# Altium PCB Audio_analyzer.PcbDoc
Units mil, origin at the board's own origin, x right, y up, seen from the top; angles counter-clockwise.
Board outline 2200.66 x 1965.67 mil, 2 copper layers (Top Layer, Bottom Layer); 45 components, 93 nets, 234 pads, 90 vias.
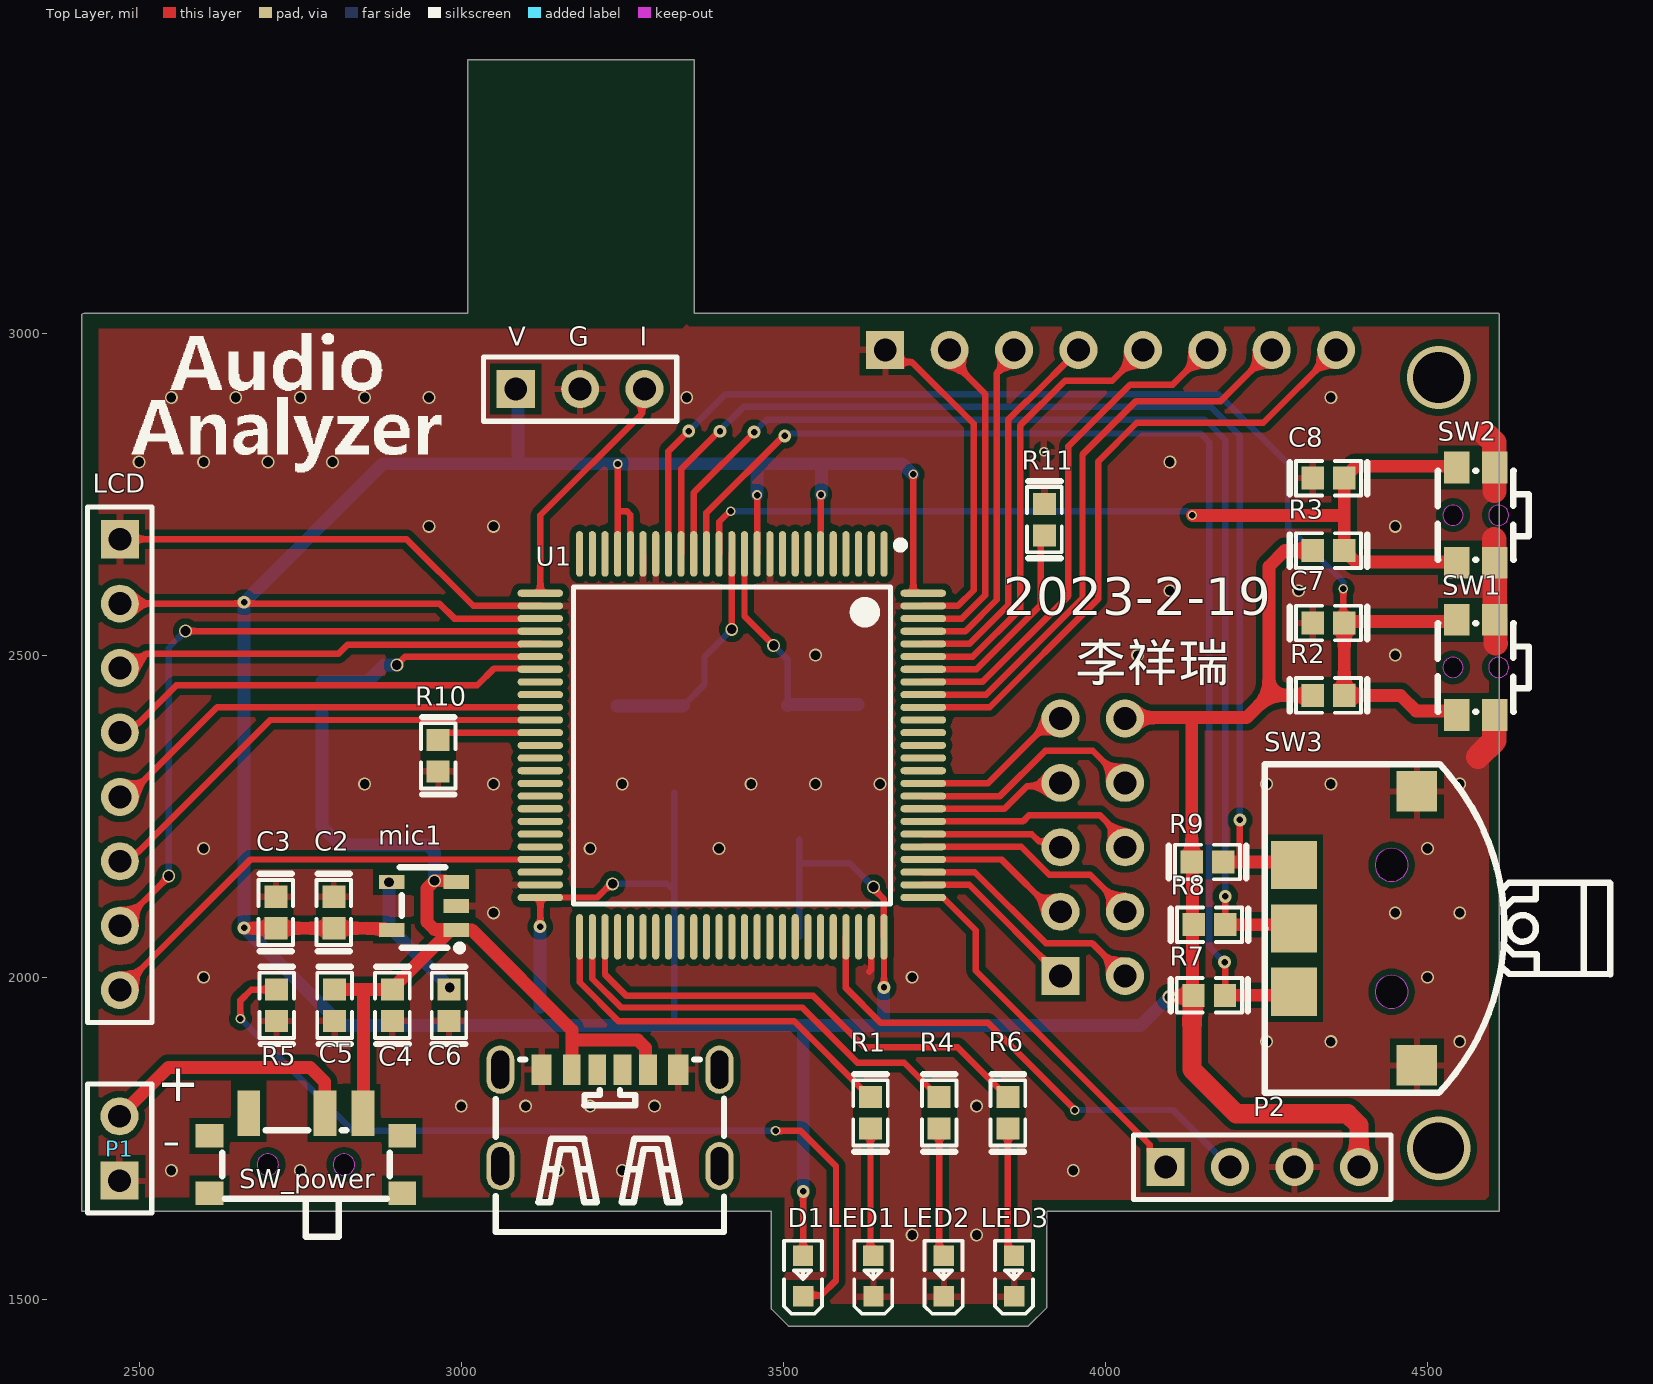
[diagram p0: Top Layer view]
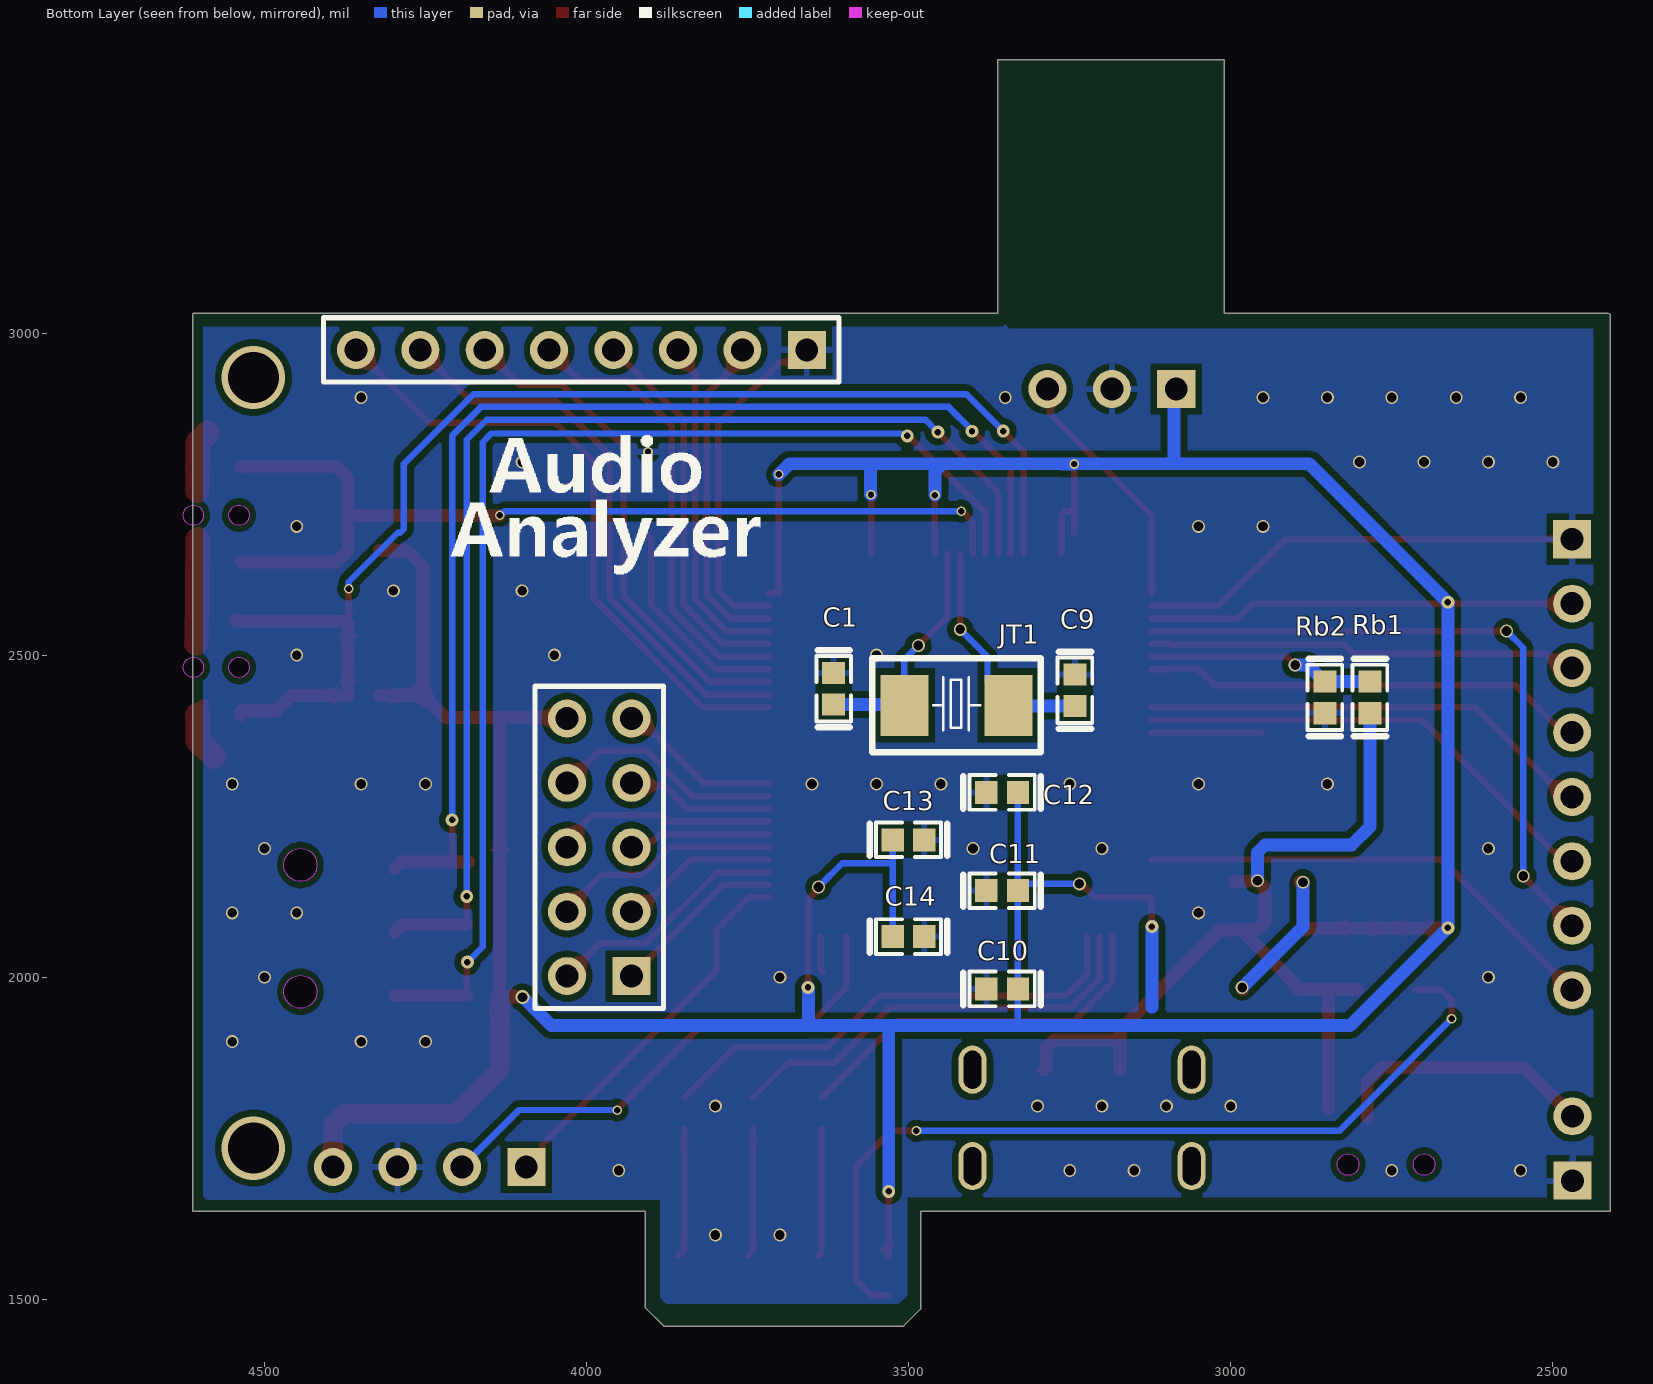
[diagram p1: Bottom Layer view, seen from below]

## Layer stack, top to bottom
Top Solder: solder mask 0.4, Solder Resist, Dk 3.5
Top Layer: signal copper 1.4
Dielectric 1: dielectric 12.6, FR-4, Dk 4.8
Bottom Layer: signal copper 1.4
Bottom Solder: solder mask 0.4, Solder Resist, Dk 3.5

## Board outline
3481.61,1484.95 3481.61,1636.45 2412.31,1636.45 2410.94,1636.4 2410.94,3029.59 2414.27,3030.55 3009.87,3030.55 3009.87,3424.26 3362.01,3424.26 3362.01,3030.55 4610.82,3030.55 4611.61,3029.56 4611.61,1636.38 4608.86,1636.45 3909.22,1636.45 3909.22,1487.55 3880.26,1458.59 3507.97,1458.59

## Design rules (kind name [scope] priority, off if disabled: settings)
Clearance [All] p1: gap=3 ignorepadtopadclearanceinfootprint=FALSE
DiffPairsRouting [All] p1: maxlimit=10 minlimit=0.1 mostfreqgap=10 toplayer_minwidth=0.15 toplayer_maxwidth=15 toplayer_prefwidth=15 bottomlayer_minwidth=0.15 bottomlayer_maxwidth=15 bottomlayer_prefwidth=15 maxuncoupledlength=500
HoleSize [All] p1: absolutevalues=TRUE maxlimit=100 minlimit=0.08 maxpercent=80.000 minpercent=20.000
HoleToHoleClearance [All] p1: gap=0.1 allowstackedmicrovias=TRUE
MinimumSolderMaskSliver [All] p1: minsoldermaskwidth=0.1
PolygonConnect [All] p1: connectstyle=Relief reliefconductorwidth=10 reliefentries=4 polygonreliefangle="90 Angle" airgapwidth=10
RoutingVias [All] p1: holewidth=28 width=50 viastyle="Through Hole" minholewidth=2.8 minwidth=1.06 maxholewidth=28 maxwidth=89.37
SilkToSilkClearance [All] p1: silktosilkclearance=0.1
SilkToSolderMaskClearance [IsPad] p1: minsilkscreentomaskgap=1 clearancetoexposedcopper=TRUE
SolderMaskExpansion [All] p1: expansion=4 istentingtop=FALSE
Width [All] p1: maxlimit=37.56 minlimit=0.21 preferedwidth=10
24 further rules are at their usual default settings.

## Classes and differential pairs
polygon class PolygonClass_1: GND_L02_P000
component class "_Geeky_ Sheet1 copy_2023-02-18": C1 C2 C3 C4 C5 C6 C7 C8 C9 C10 C11 C12 C13 C14 D1 JT1 LED3 mic1 P2 R1 R2 R3 R4 R5 R6 R7 R8 R9 R10 R11 Rb1 Rb2 SW1 SW2 SW3 SW_power U1 "V     G      I"

## Components (designator, comment, footprint, x,y, rotation, side; value= is the part's Value field where it differs from the comment)
1 "接口" typr-c 3241.1,1747.1 r0 top
C1 "22P" 0603 3623.21,2452.97 r270 bottom
C2 "Cap" 0603 2795.22,2105.59 r270 top value=0.1uF
C3 "Cap" 0603 2705.34,2105.59 r270 top value=10uF
C4 "Cap" 0603 2900.08,1951.37 r90 top value=0.1uF
C5 "Cap" 0603 2810.21,1951.37 r90 top value=10uF
C6 "Cap" 0603 2987.81,1951.37 r90 top value=470uF
C7 "100n" 0603 4351.28,2556.82 r180 top
C8 "100n" 0603 4351.28,2781.64 r180 top
C9 "22P" 0603 3248.7,2450.65 r270 bottom
C10 "100n" 0603 3360,1975 r180 bottom
C11 "100n" 0603 3360,2127.5 r180 bottom
C12 "100n" 0603 3360,2280 r180 bottom
C13 "100n" 0603 3495.28,2220.29 r0 bottom
C14 "10u" 0603 3495.28,2070 r0 bottom
D1 "LED0" led_2 3524.98,1537.54 r90 top
JT1 "8MHz" OSC-SMD_L5.0-W3.2 3430,2420 r0 bottom
LCD "Header 8" HDR1X8 2470,2680 r270 top (schematic designator P3)
LED1 "17-21SUYC/TR8" led 3649.19,1532.54 r90 top
LED2 "17-21/BHC-XL2M2TY/3T" led 3758.39,1532.54 r90 top
LED3 "D-W080508W1-KS2" led_2 3852.6,1537.54 r90 top
mic1 "MIC5219" mic5219 2947.4,2110.5 r180 top
P1 "Header 2H" HDR1X2 2469.55,1684.15 r90 top
P2 "Header 4" HDR1X4 4093.53,1705.33 r0 top
R1 "1K" 0603 3628.43,1794.42 r270 top
R2 "10k" 0603 4351.28,2444.4 r180 top
R3 "10k" 0603 4351.28,2669.23 r180 top
R4 "1K" 0603 3735.08,1794.42 r270 top
R5 "Res1" 0603 2720.34,1951.37 r90 top value=1K
R6 "1K" 0603 3841.73,1794.42 r270 top
R7 "10k" 0603 4166.29,1978.87 r180 top
R8 "10k" 0603 4166.56,2088.47 r180 top
R9 "10k" 0603 4163.54,2185.77 r180 top
R10 "1k" 0603 2971.1,2338.7 r90 top
R11 "1k" 0603 3912.18,2705.35 r90 top
Rb1 "Res1" 0603 2790.71,2439.42 r270 bottom value=100K
Rb2 "Res1" 0603 2847,2429.42 r90 bottom value=100K
SW1 "ST-1186BE" SW-SMD_ST-1186BE 4579.98,2455.05 r90 top
SW2 "ST-1186BE" SW-SMD_ST-1186BE 4579.98,2691.48 r90 top
SW3 "TM-2022-3" 旋钮 4559.31,2073.77 r270 top
SW_power "MK-12C02-G025" sw22 2747.5,1756.9 r0 top
U1 "STM32F103VET6" LQFP-100_L14.0-W14.0-P0.50-LS16.0-BL 3420,2360 r180 top
"V     G      I" "HDR-F-2.54_1x3" HDR1X3 3084.57,2913.2 r0 top (schematic designator H1)
? "Comment" HDR1X8 3658.17,2973.86 r0 bottom
? "Comment" HDR2X5 3930.4,2001.77 r90 bottom

## Footprints (in the part's own frame and the unit in brackets; to place one, negate y for a bottom-side part, rotate by r counter-clockwise, add the part's x,y. Pads: shape width x height; smd on the part's side, far side on the other; paste and mask are expansions set on the pad)
0603 [mil]
  rect 34.38x35.72 smd mask+2: 1(-19.47,6.86) 2(29.47,6.86)
  silkscreen extent -55,-20 65,34
HDR1X2 [mm] "Connector; Header; 2 Position"
  rect 1.5x1.5 hole 0.9: 1(0,0)
  round 1.5 hole 0.9: 2(2.54,0)
  silkscreen extent -1.27,-1.27 3.81,1.27
HDR1X3 [mm] "Connector; Header; 3 Position"
  rect 1.5x1.5 hole 0.9: 1(0,0)
  round 1.5 hole 0.9: 2(2.54,0) 3(5.08,0)
  silkscreen extent -1.27,-1.27 6.35,1.27
HDR1X4 [mm] "Connector; Header; 4 Position"
  rect 1.5x1.5 hole 0.9: 1(0,0)
  round 1.5 hole 0.9: 2(2.54,0) 3(5.08,0) 4(7.62,0)
  silkscreen extent -1.27,-1.27 8.89,1.27
HDR1X8 [mm] "Connector; Header; 8 Position"
  rect 1.5x1.5 hole 0.9: 1(0,0)
  round 1.5 hole 0.9: 2(2.54,0) 3(5.08,0) 4(7.62,0) 5(10.16,0) 6(12.7,0) 7(15.24,0) 8(17.78,0)
  silkscreen extent -1.27,-1.27 19.05,1.27
HDR2X5 [mm] "Connector; Header; 5x2 Position"
  rect 1.5x1.5 hole 0.9: 1(0,0)
  round 1.5 hole 0.9: 2(0,2.54) 3(2.54,0) 4(2.54,2.54) 5(5.08,0) 6(5.08,2.54) 7(7.62,0) 8(7.62,2.54) 9(10.16,0) 10(10.16,2.54)
  silkscreen extent -1.27,-1.27 11.43,3.81
led [mm]
  rect 0.8x0.8 smd mask+0.051: 1(-0.707,0.234) 2(0.892,0.241)
  silkscreen extent -1.4,-0.51 1.48,0.99
led_2 [mm]
  rect 0.8x0.8 smd mask+0.051: 1(0.765,-0.14) 2(-0.834,-0.147)
  silkscreen extent -1.52,-0.89 1.36,0.61
LQFP-100_L14.0-W14.0-P0.50-LS16.0-BL [mm]
  oval 0.28x1.8 smd: 1(-6,-7.55) 2(-5.5,-7.55) 3(-5,-7.55) 4(-4.5,-7.55) 5(-4,-7.55) 6(-3.5,-7.55) 7(-3,-7.55) 8(-2.5,-7.55) 9(-2,-7.55) 10(-1.5,-7.55) 11(-1,-7.55) 12(-0.5,-7.55) 13(0,-7.55) 14(0.5,-7.55) 15(1,-7.55) 16(1.5,-7.55) 17(2,-7.55) 18(2.5,-7.55) 19(3,-7.55) 20(3.5,-7.55) 21(4,-7.55) 22(4.5,-7.55) 23(5,-7.55) 24(5.5,-7.55) 25(6,-7.55) 51(6,7.55) 52(5.5,7.55) 53(5,7.55) 54(4.5,7.55) 55(4,7.55) 56(3.5,7.55) 57(3,7.55) 58(2.5,7.55) 59(2,7.55) 60(1.5,7.55) 61(1,7.55) 62(0.5,7.55) 63(0,7.55) 64(-0.5,7.55) 65(-1,7.55) 66(-1.5,7.55) 67(-2,7.55) 68(-2.5,7.55) 69(-3,7.55) 70(-3.5,7.55) 71(-4,7.55) 72(-4.5,7.55) 73(-5,7.55) 74(-5.5,7.55) 75(-6,7.55)
  oval 1.8x0.28 smd: 26(7.55,-6) 27(7.55,-5.5) 28(7.55,-5) 29(7.55,-4.5) 30(7.55,-4) 31(7.55,-3.5) 32(7.55,-3) 33(7.55,-2.5) 34(7.55,-2) 35(7.55,-1.5) 36(7.55,-1) 37(7.55,-0.5) 38(7.55,0) 39(7.55,0.5) 40(7.55,1) 41(7.55,1.5) 42(7.55,2) 43(7.55,2.5) 44(7.55,3) 45(7.55,3.5) 46(7.55,4) 47(7.55,4.5) 48(7.55,5) 49(7.55,5.5) 50(7.55,6) 76(-7.55,6) 77(-7.55,5.5) 78(-7.55,5) 79(-7.55,4.5) 80(-7.55,4) 81(-7.55,3.5) 82(-7.55,3) 83(-7.55,2.5) 84(-7.55,2) 85(-7.55,1.5) 86(-7.55,1) 87(-7.55,0.5) 88(-7.55,0) 89(-7.55,-0.5) 90(-7.55,-1) 91(-7.55,-1.5) 92(-7.55,-2) 93(-7.55,-2.5) 94(-7.55,-3) 95(-7.55,-3.5) 96(-7.55,-4) 97(-7.55,-4.5) 98(-7.55,-5) 99(-7.55,-5.5) 100(-7.55,-6)
  silkscreen extent -6.8,-8.05 6.25,6.25
mic5219 [mm]
  rect 1x0.55 smd mask+0.051: 1(-1.144,0.948) 2(-1.144,-0.002) 3(-1.144,-0.952) 4(1.399,-0.952) 5(1.399,0.948)
  silkscreen extent -1.4,-1.52 1.1,1.78
OSC-SMD_L5.0-W3.2 [mm]
  rect 1.9x2.4 smd mask+0.051: 1(-2.154,-0.055) 2(1.946,-0.055)
  silkscreen extent -3.43,-1.91 3.22,1.8
sw22 [mm]
  rect 0.9x1.8 smd mask+0.051: 1(-1.964,0.819) 2(1.036,0.819) 3(2.536,0.819)
  rect 1.1x0.93 smd mask+0.051: 4(4.086,-0.077) 5(4.086,-2.347) 6(-3.514,-2.347) 7(-3.514,-0.077)
  Keep-Out Layer board cut-out: 2.211,-1.212 2.169,-1.028 2.051,-0.88 1.881,-0.798 1.691,-0.798 1.521,-0.88 1.403,-1.028 1.361,-1.212 1.361,-1.212 1.403,-1.397 1.521,-1.545 1.691,-1.627 1.881,-1.627 2.051,-1.545 2.169,-1.397 2.211,-1.212
  Keep-Out Layer board cut-out: -0.789,-1.212 -0.831,-1.028 -0.949,-0.88 -1.119,-0.798 -1.309,-0.798 -1.479,-0.88 -1.597,-1.028 -1.639,-1.212 -1.639,-1.212 -1.597,-1.397 -1.479,-1.545 -1.309,-1.627 -1.119,-1.627 -0.949,-1.545 -0.831,-1.397 -0.789,-1.212
  silkscreen extent -3.01,-4.06 3.59,0.14
SW-SMD_ST-1186BE [mm]
  rect 1.25x1 smd mask+0.051: 1(-1.217,0.877) 2(2.533,0.877) 3(-1.217,-0.623) 4(2.533,-0.623)
  Keep-Out Layer board cut-out: 1.058,1.027 1.018,1.2 0.907,1.34 0.747,1.417 0.569,1.417 0.409,1.34 0.298,1.2 0.258,1.027 0.258,1.027 0.298,0.853 0.409,0.714 0.569,0.637 0.747,0.637 0.907,0.714 1.018,0.853 1.058,1.027
  Keep-Out Layer board cut-out: 1.058,-0.773 1.018,-0.599 0.907,-0.46 0.747,-0.383 0.569,-0.383 0.409,-0.46 0.298,-0.599 0.258,-0.773 0.258,-0.773 0.298,-0.946 0.409,-1.086 0.569,-1.163 0.747,-1.163 0.907,-1.086 1.018,-0.946 1.058,-0.773
  silkscreen extent -1.09,-1.95 2.41,1.63
typr-c [mil]
  rect 31.5x47.2 smd mask+2: 1(-116.65,109.4) 6(95.95,109.4)
  rect 27.6x47.2 smd mask+2: 2(-69.45,109.4) 3(-30.05,109.4) 4(9.35,109.4) 5(48.75,109.4)
  oval 43.3x74.8 hole 27.6 slot 59.1 at 90 deg mask+2: 7(-180.45,-40.2) 7(-180.45,109.4) 7(159.75,-40.2) 7(159.75,109.4)
  silkscreen extent -188,-143 167,125
旋钮 [mm]
  rect 1.6x1.6 smd mask+0.051: a(-5.454,-1.922) a(5.346,-1.922)
  rect 1.9x1.8 smd mask+0.051: b(2.446,-6.772) c(-0.054,-6.772) d(-2.554,-6.772)
  Keep-Out Layer board cut-out: 3.096,-2.922 3.031,-2.64 2.851,-2.414 2.59,-2.289 2.301,-2.289 2.041,-2.414 1.86,-2.64 1.796,-2.922 1.796,-2.922 1.86,-3.204 2.041,-3.431 2.301,-3.556 2.59,-3.556 2.851,-3.431 3.031,-3.204 3.096,-2.922
  Keep-Out Layer board cut-out: -1.904,-2.922 -1.969,-2.64 -2.149,-2.414 -2.41,-2.289 -2.699,-2.289 -2.959,-2.414 -3.14,-2.64 -3.204,-2.922 -3.204,-2.922 -3.14,-3.204 -2.959,-3.431 -2.699,-3.556 -2.41,-3.556 -2.149,-3.431 -1.969,-3.204 -1.904,-2.922
  silkscreen extent -6.54,-7.92 6.42,5.7

## Part data
1: library part type-c, "TYPE_C"
C1 C9: library part 20P, nameAlias=Value(F), spicePre=C, spiceSymbolName=Cap_0805_US
C2 C3 C4 C5 C6: "Capacitor", LatestRevisionDate=17-Jul-2002, LatestRevisionNote="Re-released for DXP Platform.", PackageDescription="Radial Cap, Thru-Hole; 2 Leads; 0.3 in Pin Spacing", PackageReference=RAD-0.3, Published=8-Jun-2000, Publisher="Altium Limited"
C14: library part 22u, nameAlias=Value(F), spicePre=C, spiceSymbolName=Cap_0805_US
D1: "Typical INFRARED GaAs LED", LatestRevisionDate=08-Jul-2005, LatestRevisionNote="Mech Layer 1 removed.", PackageDescription="LED; 2 Leads", PackageReference=LED-0, Published=8-Jun-2000, Publisher="Altium Limited"
JT1: BOM_Manufacturer="TAITIEN Elec", BOM_Manufacturer Part=XIHCELNANF-48MHZ, BOM_Supplier=LCSC, BOM_Supplier Part=C295085, Contributor=LCSC, nameAlias=Frequency, spicePre=X, spiceSymbolName=XIHCELNANF-48MHZ
LCD: "Header, 8-Pin", LatestRevisionDate=17-Jul-2002, LatestRevisionNote="Re-released for DXP Platform.", Publisher="Altium Limited"
LED1: BOM_LCSC Assembly=Yes, BOM_Manufacturer=KENTO, BOM_Manufacturer Part=17-21SUYC/TR8, BOM_Supplier=LCSC, BOM_Supplier Part=C2296, image=//image.lceda.cn/szlcsc/C2296.jpg, SMT Type=Basic, spicePre=L, spiceSymbolName=17-21SUYC/TR8
LED2: BOM_LCSC Assembly=Yes, BOM_Manufacturer=EVERLIGHT, BOM_Manufacturer Part=17-21/BHC-XL2M2TY/3T, BOM_Supplier=LCSC, BOM_Supplier Part=C72035, image=//image.lceda.cn/szlcsc/C72035.jpg, SMT Type=Extend, spicePre=L, spiceSymbolName=17-21/BHC-XL2M2TY/3T
LED3: BOM_Manufacturer=ARKLED, BOM_Manufacturer Part=D-W080508W1-KS2, BOM_Supplier=LCSC, BOM_Supplier Part=C130115, Contributor=LCSC, spicePre=L, spiceSymbolName=D-W080508W1-KS2
P1: "Header, 2-Pin, Right Angle", LatestRevisionDate=17-Jul-2002, LatestRevisionNote="Re-released for DXP Platform.", Publisher="Altium Limited"
P2: "Header, 4-Pin", LatestRevisionDate=17-Jul-2002, LatestRevisionNote="Re-released for DXP Platform.", Publisher="Altium Limited"
R1 R4 R6: library part 330, nameAlias=Value(Ω), spicePre=R, spiceSymbolName=Res_0805(1/8W)_EU
R5 Rb1 Rb2: "Resistor", LatestRevisionDate=17-Jul-2002, LatestRevisionNote="Re-released for DXP Platform.", PackageDescription="Axial Device, Thru-Hole; 2 Leads; 0.3 in Pin Spacing", PackageReference=AXIAL-0.3, Published=8-Jun-2000, Publisher="Altium Limited"
R10 R11: library part 10k, nameAlias=Value(Ω), spicePre=R, spiceSymbolName=Res_0805(1/8W)_EU
SW1 SW2: Actuator/Cap Color=黑色, Contact Current=50mA, Insulation Resistance=100MΩ, JLCPCB Part Class="Extended Part", LCSC Part Name=轻触开关侧按小龟, Manufacturer=RISHENG(日昇), Operating Force=240gf@±50gf, Operating Temperature=-20℃~+85℃, Voltage Rating (DC)=12V, Actuator Style=矩形按钮, Add into BOM=yes, Circuit=单刀单掷, Convert to PCB=yes, Datasheet=https://atta.szlcsc.com/upload/public/pdf/source/20200922/C589197_4714EBBCA4733C94112B39947E772B4E.pdf, Device=ST-1186BE, Manufacturer Part=ST-1186BE, Mechanical Life=50000, Mounting Style=卧贴, Name=ST-1186BE, Pin Style=SMD接片, Strike Gundam=否, Supplier=LCSC, Supplier Footprint=SMD, Supplier Part=C589197, Switch Height=1.45mm, Switch Length=3.5mm, Switch Width=3mm, Symbol=ST-1186BE
SW3: JLCPCB Part Class="Extended Part", LCSC Part Name="数码相机拨轮开关  3挡拨轮开关", Manufacturer="XKB Connectivity(中国星坤)", Add into BOM=yes, Convert to PCB=yes, Datasheet=https://atta.szlcsc.com/upload/public/pdf/source/20211015/3476D939D9FB2BD124C91E3A6F460D4F.pdf, Device=TM-2022-3, Manufacturer Part=TM-2022-3, Name=TM-2022-3, Supplier=LCSC, Supplier Footprint=SMD, Supplier Part=C318952, Symbol=TM-2022-3
SW_power: Actuator Color=黑色, Current Rating (DC)=1A, JLCPCB Part Class="Extended Part", LCSC Part Name=七脚小拨动开关2.5柄, Manufacturer=G-Switch(品赞), Operating Temperature=-20℃~+70℃, Voltage Rating (DC)=6V, Actuator Style=矩形柱状, Add into BOM=yes, Circuit=单刀双掷, Convert to PCB=yes, Datasheet=https://atta.szlcsc.com/upload/public/pdf/source/20200902/C778186_2AF08473ED98414D93A175E8814EEFA6.pdf, Device=MK-12C02-G025, Manufacturer Part=MK-12C02-G025, Mechanical Life=10000, Mounting Style=卧贴, Name=MK-12C02-G025, Pin Style=SMD接片, Supplier=LCSC, Supplier Footprint=SMD, Supplier Part=C778186, Switch Height=5.2mm, Switch Length=6.6mm, Switch Width=2.7mm, Symbol=MK-12C02-G025
U1: BOM_LCSC Assembly=Yes, BOM_Manufacturer=STMicroelectronics, BOM_Manufacturer Part=STM32F103VET6, BOM_Supplier=LCSC, BOM_Supplier Part=C8308, image=//image.lceda.cn/szlcsc/C8308.jpg, SMT Type=Basic, spicePre=U, spiceSymbolName=STM32F103VET6
C7 C8 C10 C11 C12 C13: nameAlias=Value(F), spicePre=C, spiceSymbolName=Cap_0805_US
R2 R3 R7 R8 R9: nameAlias=Value(Ω), spicePre=R, spiceSymbolName=Res_0805(1/8W)_EU
"V     G      I": BOM_Supplier=LCSC, BOM_Supplier Part=C146690, Contributor=LCEDA_Lib, spicePre=H, spiceSymbolName=HDR-F-2.54_1x3

## Via types
v1: diameter 20, hole 15, Top Layer to Bottom Layer, 64 vias
v2: diameter 20, hole 10, Top Layer to Bottom Layer, 12 vias
v3: diameter 15, hole 10, Top Layer to Bottom Layer, 11 vias
v4: diameter 98.43, hole 78.74, Top Layer to Bottom Layer, 2 vias
v5: diameter 22, hole 15, Top Layer to Bottom Layer, 1 vias

## Nets (pads, with @x,y where several pads share a name; then routed paths per layer and width w, separated by ;. In a path a pad name is that pad's centre, name@x,y a point inside that pad or via, vN(x,y) a via of type N, cw(c..) or ccw(c..) an arc to the next point about the centre after c; other vN are vias at no path point)
+3.3V: "V     G      I.1" ?.10 C2.2 C3.2 C10.2 C11.2 C12.2 C13.2 C14.2 D1.1 LCD.2 mic1.5 P2.4 R2.2 R3.2 R7.2 R8.2 R9.2 U1.6 U1.11 U1.21 U1.22 U1.28 U1.50 U1.75 U1.100 | length 7973
  Top Layer w10: LCD.2 2966.21,2580 2989.36,2556.85 U1.28 ; v2(3122.45,2078.57) 3122.76,2078.87 U1.50 3211.07,2123.78 3232.29,2145 v1(3235,2145) ; U1.22@3242.83,2689.59 3242.83,2723.73 ; v3(3242.83,2796.83) 3242.83,2723.73 ; U1.21 3262.52,2717.87 3256.66,2723.73 3242.83,2723.73 ; v3(3459.19,2748.58) 3459.37,2748.4 U1.11 ; D1.1 D1.1@3539.64,1576.82 ; D1.1@3530.81,1573.97 v2(3530.84,1667.53) ; U1.6 3558,2657.44 3558,2748.62 v3(3558.45,2749.07) ; v1(3640,2140) 3640,2137.29 3656.22,2121.07 U1.75 3656.26,2062.72 3656.26,1984.27 v2(3656.3,1984.23) ; v3(3701.7,2780.64) 3701.7,2596.69 3702.17,2596.22 U1.100
  Top Layer w20: v2(2662.96,2076.64) 2663.48,2076.12 C3.2 C2.2 2880.54,2076.12 2883.48,2073.18 mic1.5 ; ?.10@4026.56,2403.08 4219.3,2403.08 ; v5@4099.65,1968.89 v5(4099.4,1969.14) 4099.78,1969.52 4134.33,1969.52 R7.2 4135.45,1973.39 4135.45,2177.54 R9.2 4134.07,2401.08 ; 4220.71,2404.49 4253.76,2437.54 ; R2.2 4253.76,2437.54 ; R3.2 4278.51,2662.37 4253.76,2637.63 4253.76,2437.54
  Top Layer w30: R7.2@4134.33,1969.52 4134.33,1856.83 4203.25,1787.91 4375.96,1787.91 4393.53,1770.34 P2.4
  Bottom Layer w10: v1(3235,2145) 3319.89,2145 C11.2 ; C12.2 C11.2 ; 3332.1,1924.9 3330.53,1926.47 C10.2 C11.2 ; C14.2 3524.75,2175.47 3526.18,2176.9 ; C13.2 3524.75,2178.33 3526.18,2176.9 ; v1(3640,2140) 3603.1,2176.9 3526.18,2176.9
  Bottom Layer w20: 3088.01,2894.87 3088.01,2797.24 ; 3122.45,1953.48 v2(3122.45,2078.57) ; v3(3459.19,2748.58) 3459.19,2785.52 3447.47,2797.24 ; v2(3530.84,1667.53) 3530.84,1924.9 ; v3(3558.45,2749.07) 3559.19,2749.81 3559.19,2797.24 ; v2(3656.3,1984.23) 3655.51,1983.45 3655.51,1924.9 ; v3(3701.7,2780.64) 3685.09,2797.24 3559.19,2797.24 ; v5@4099.03,1969.44 4054.49,1924.9 3657.09,1924.9 3656.3,1925.68 3655.51,1924.9 ; 3088.01,2797.24 3242.42,2797.24 v3(3242.83,2796.83) 3262.11,2796.83 3262.52,2797.24 3447.47,2797.24 ; 3088.01,2797.24 2878.11,2797.24 v2(2662.96,2582.09) v2(2662.96,2076.64) 2814.7,1924.9 3332.1,1924.9 3530.84,1924.9 ; 3447.47,2797.24 3559.19,2797.24 ; 3530.84,1924.9 3655.51,1924.9
+5V: 1.2 1.5 C4.2 C5.2 mic1.1 mic1.3 Rb1.2 SW_power.3 | length 1433
  Top Layer w10: mic1.3 mic1.3@2998.28,2142.17
  Top Layer w20: C5.2 2848.29,1980.84 ; SW_power.3@2848.29,1796.36 2848.29,1980.84 ; mic1.1@2979.48,2069.07 2901.09,1990.68 2901.09,1988.03 2893.9,1980.84 C4.2 2848.29,1980.84 ; mic1.3 2991.62,2148.82 2976.06,2148.82 2975.13,2149.75 v1(2958.57,2149.75) 2946.85,2138.03 2946.85,2085.73 2958.57,2074.01 2991.62,2074.01 mic1.1 2992.87,2073.6 3016.35,2073.6 3171.65,1918.3 3171.65,1902.35 ; 1.2 3171.65,1902.35 ; 1.5 3286.05,1860.3 3286.05,1890.63 3274.33,1902.35 3171.65,1902.35
  Bottom Layer w20: Rb1.2 2783.85,2233.85 2812.4,2205.3 2946.85,2205.3 2958.57,2193.58 v1(2958.57,2149.75)
BOOT0: R11.1 U1.94 | length 334.2
  Top Layer w10: U1.94 3800,2478.11 3899.66,2577.77 3899.66,2680.23 R11.1
BOOT1: R10.2 U1.37 | length 171
  Top Layer w10: R10.2@2951.75,2379.68 U1.37
GND: 1.1 1.6 "V     G      I.2" ?.1@3658.17,2973.86 C1.1 C2.1 C3.1 C4.1 C5.1 C6.1 C7.2 C8.2 C9.1 C10.1 C11.1 C12.1 C13.1 C14.1 LCD.1 LED1.1 LED2.1 LED3.2 mic1.2 P1.1 P2.3 R5.1 R10.1 R11.2 Rb2.1 SW1.3 SW1.4 SW2.3 SW2.4 SW3.a U1.10 U1.19 U1.20 U1.27 U1.49 U1.74 U1.99 | length 1639.5
  Top Layer w10: LCD.1 2915,2680 3018.46,2576.54 U1.27 U1.27@3122.56,2576.74 ; 3633.07,2008.57 3636.54,2012.04 U1.74 ; ?.1@3658.17,2973.86 3677.03,2955.01 3699.44,2955.01 3795.38,2859.07 3795.38,2600.77 3771.15,2576.54 U1.99 ; SW1.3 SW1.3@4604.51,2416.35
  Top Layer w20: SW1.3@4594.82,2421.74 4600.21,2416.35 SW1.3@4604.51,2416.35
  Top Layer w37.56: 4578.43,2342.16 4603.6,2367.33 4603.6,2406.23 SW1.3 ; 4588.27,2845.37 4603.6,2830.05 4603.6,2792.11 SW2.4 4603.85,2790.55 4603.85,2754.92 ; 4603.43,2679.86 4603.6,2679.68 4603.6,2644.47 SW2.3 SW1.4 4605.41,2553.87 4605.41,2518.95 4605.89,2518.48
  other v1: 3700,1600 3800,1600 2550,1700 2750,1700 3150,1700 3250,1700 3950,1700 3000,1800 3100,1800 3200,1800 3300,1800 3800,1800 4250,1900 4350,1900 4550,1900 2600,2000 3700,2000 4500,2000 3050,2100 4450,2100 4550,2100 2600,2200 3200,2200 3400,2200 4500,2200 2850,2300 3050,2300 3250,2300 3450,2300 3550,2300 3650,2300 4250,2300 4350,2300 4550,2300 3550,2500 4050,2500 4450,2500 4100,2600 4300,2600 2950,2700 3050,2700 4450,2700 2500,2800 2600,2800 2700,2800 2800,2800 4100,2800 2550,2900 2650,2900 2750,2900 2850,2900 2950,2900 3350,2900 4350,2900
  other v3: 3904.68,2815.75
KEY1: R7.1 SW3.b U1.15 | length 1873.7
  Top Layer w10: U1.15 3380.63,2720.9 3500.1,2840.38 v2(3502.21,2840.38) ; v2@4185.27,2015.42 4185.76,2014.93 R7.1
  Top Layer w20: R7.1 4298.14,1972.02 SW3.b@4298.38,1971.77
  Bottom Layer w10: v2(3502.21,2840.38) ccw(c3502.21,2853.19) 3511.27,2844.13 4147.77,2844.13 4150.7,2841.2 4161.15,2830.75 4161.15,2047.34 v2(4185.01,2023.48)
KEY2: R8.1 SW3.c U1.16 | length 1849.7
  Top Layer w10: U1.16 3360.94,2752.42 v2(3454.72,2846.2) ; R8.1 4186.03,2125.61 v2(4186.08,2125.66)
  Top Layer w20: R8.1 4286.98,2081.61 SW3.c@4298.38,2070.2
  Bottom Layer w10: v2(3454.72,2846.2) 3473.9,2865.38 4154.8,2865.38 4185.85,2834.33 4185.85,2125.89 v2(4186.08,2125.66)
KEY3: R9.1 SW3.d U1.17 | length 1842
  Top Layer w10: U1.17 3341.26,2788.63 3400.2,2847.57 v2(3401.72,2847.57) ; R9.1 R9.1@4184.11,2180.01 ; 4207.11,2178.91 4208.85,2180.66 v2(4208.85,2244.2)
  Top Layer w20: R9.1 4207.11,2178.91 4288.1,2178.91 SW3.d SW3.d@4298.38,2168.63
  Bottom Layer w10: v2(3401.72,2847.57) 3401.72,2849.09 3438.01,2885.38 4163.99,2885.38 4208.85,2840.51 v2(4208.85,2244.2)
KEY4: C7.1 R2.1 SW1.1 SW1.2 U1.18 | length 1959
  Top Layer w10: U1.18 3321.57,2816.52 3352.98,2847.93 v2(3353.21,2847.93) ; v3(4369.25,2602.92) 4369.25,2551.45 C7.1
  Top Layer w20: SW1.1@4536.55,2407.14 4536.55,2412.5 4535.76,2413.29 4482.36,2413.29 4458.11,2437.54 R2.1 C7.1 4373.16,2552.37 4543.04,2552.37 SW1.2
  Bottom Layer w10: v2(3353.21,2847.93) 3410.66,2905.38 4175.29,2905.38 4283.8,2796.87 4283.8,2695.71 4289.66,2689.85 4293.3,2689.85 4369.25,2613.89 v3(4369.25,2602.92)
LED1: R1.1 U1.51 | length 596
  Top Layer w10: U1.51 3183.78,1992.04 3244.07,1931.75 3516.76,1931.75 3634.62,1813.89 R1.1
LED2: R4.1 U1.52 | length 679.6
  Top Layer w10: U1.52 3203.46,1997.82 3248.26,1953.01 3529.5,1953.01 3615.08,1867.43 3687.73,1867.43 3741.27,1813.89 R4.1
LED3: R6.1 U1.53 | length 762.7
  Top Layer w10: U1.53 3223.15,2004.43 3256.56,1971.01 3546.43,1971.01 3626.12,1891.32 3770.49,1891.32 3847.91,1813.89 R6.1
NetC6_2: C6.2 mic1.4 | length 210.9
  Top Layer w20: v1(2887.95,2147.55) 2888.39,2147.99 mic1.4 ; C6.2 2981.86,1981.75 2981.86,1983.81 v1(2982.25,1984.2)
  Bottom Layer w20: v1(2887.95,2147.55) 2887.95,2078.5 v1(2982.25,1984.2)
NetD1_2: D1.2 R5.2 | length 1348.8
  Top Layer w10: v3(2657.19,1935.62) 2657.19,1964 2674.03,1980.84 R5.2@2712.81,1980.84 ; v3(3487.91,1761.58) 3526.58,1761.58 3581.72,1706.45 3581.72,1529.17 3558.77,1506.22 3532.26,1506.22 D1.2
  Bottom Layer w10: v3(2657.19,1935.62) 2831.23,1761.58 v3(3487.91,1761.58)
NetLED1_2: LED1.2 R1.2 | length 199.1
  Top Layer w10: R1.2 3635.29,1572.06 LED1.2
NetLED2_2: LED2.2 R4.2 | length 200.2
  Top Layer w10: R4.2 3741.94,1574.62 LED2.2
NetLED3_1: LED3.1 R6.2 | length 201.2
  Top Layer w10: R6.2 3848.59,1577.18 LED3.1
NetPOWER_2: P1.2 SW_power.2 | length 414.8
  Top Layer w20: P1.2 2545.25,1859.85 2765.65,1859.85 2788,1837.5 SW_power.2@2788,1781.8
OSC-IN: C1.2 JT1.2 U1.12 | length 373.1
  Top Layer w10: U1.12 3439.68,2560.32 v1(3485,2515)
  Bottom Layer w10: v1(3485,2515) 3506.61,2493.39 JT1.2
  Bottom Layer w20: JT1.2 3507.95,2423.5 C1.2
OSC-OUT: C9.2 JT1.1 U1.13 | length 369.8
  Top Layer w10: v1(3420,2540) U1.13
  Bottom Layer w10: JT1.1 3377.6,2454.56 3377.6,2497.6 v1(3420,2540)
  Bottom Layer w20: C9.2 3344.22,2421.18 JT1.1
PA0: U1.23
PA1: U1.24
PA2: U1.25
PA3: "V     G      I.3" U1.26 | length 385.3
  Top Layer w10: U1.26 3122.76,2717.07 3280.24,2874.55 3280.24,2904.22 3288.79,2912.76
PA4: LCD.7 U1.29 | length 1050.9
  Top Layer w10: LCD.7 2470,2080.62 2545.9,2156.53 v1(2545.9,2157.15) ; v1(2571.85,2537.65) 2572.13,2537.37 3122.56,2537.37 U1.29
  Bottom Layer w10: v1(2545.9,2157.15) 2545.9,2511.7 v1(2571.85,2537.65)
PA5: LCD.3 U1.30 | length 668.3
  Top Layer w10: LCD.3 2479.39,2489.39 2497.97,2489.39 2510.94,2502.35 2809.44,2502.35 2823.41,2516.31 3091.39,2516.31 3092.56,2517.48 U1.30
PA6: Rb1.1 Rb2.2 U1.31 | length 355
  Top Layer w10: v1(2900,2484.65) 2913.15,2497.8 U1.31
  Bottom Layer w20: Rb1.1 Rb2.2 2854.53,2458.89 2880.29,2484.65 v1(2900,2484.65)
PA7: LCD.4 U1.32 | length 694.4
  Top Layer w10: LCD.4 2483.27,2380 2497.43,2394.16 2498.81,2394.16 2557.8,2453.15 3024.65,2453.15 3050.79,2479.29 3091.38,2479.29 3092.56,2478.11 U1.32
PA8: U1.67
PA9: U1.68
PA10: U1.69
PA11: U1.70
PA12: U1.71
PA13: P2.2 U1.72 | length 791.6
  Top Layer w10: U1.72 3597.17,1983.29 3650.88,1929.58 3817.59,1929.58 3952.56,1794.61 v3(3952.56,1793.79)
  Bottom Layer w10: v3(3952.56,1793.79) 3952.72,1793.96 4104.91,1793.96 P2.2
PA14: P2.1 U1.76 | length 592.2
  Top Layer w10: U1.76 3747.44,2123.78 3747.95,2123.27 3748.24,2123.27 3798.71,2072.8 3798.71,2010.34 4069.01,1740.04 4069.01,1729.86 P2.1
PA15: ?.1@3930.4,2001.77 U1.77 | length 271.8
  Top Layer w10: U1.77 3788.71,2143.46 ?.1@3930.4,2001.77
PB0: LCD.5 U1.35 | length 710.4
  Top Layer w10: LCD.5 2481.9,2280 2620.96,2419.06 U1.35
PB1: LCD.6 U1.36 | length 743.6
  Top Layer w10: LCD.6 2483.27,2180 2497.78,2194.51 2498.46,2194.51 2703.32,2399.37 U1.36
PB3: U1.89
PB4: U1.90
PB5: ?.8@4358.17,2973.86 U1.91 | length 995.6
  Top Layer w10: U1.91 3820.49,2419.06 3988.63,2587.21 3988.63,2800.41 4048.83,2860.61 4244.92,2860.61 ?.8@4358.17,2973.86
PB6: ?.7@4258.17,2973.86 U1.92 | length 893.2
  Top Layer w10: U1.92 3814.71,2438.74 3964.4,2588.43 3964.4,2811.47 4047.47,2894.54 4178.85,2894.54 ?.7@4258.17,2973.86
PB7: ?.6@4158.17,2973.86 U1.93 | length 790.4
  Top Layer w10: U1.93 3808.94,2458.43 3942.53,2592.02 3942.53,2824.21 4038.28,2919.95 4104.26,2919.95 ?.6@4158.17,2973.86
PB8: ?.5@4058.17,2973.86 U1.95 | length 705.3
  Top Layer w10: U1.95 3794.24,2497.8 3867.45,2571.02 3867.45,2856.43 3937.21,2926.18 4010.49,2926.18 ?.5@4058.17,2973.86
PB9: ?.4@3958.17,2973.86 U1.96 | length 598.5
  Top Layer w10: U1.96 3788.46,2517.48 3849.45,2578.47 3849.45,2866.13 3877.51,2894.19 3878.5,2894.19 ?.4@3958.17,2973.86
PB10: LCD.8 U1.47 | length 736.8
  Top Layer w10: LCD.8 2672.83,2182.83 U1.47
PB11: U1.48
PB15: U1.54
PC4: U1.33
PC5: U1.34
PC6: U1.63
PC7: U1.64
PC8: U1.65
PC9: U1.66
PC10: ?.2@4030.4,2001.77 U1.78 | length 380
  Top Layer w10: U1.78 3797.22,2163.15 3907.32,2053.05 3979.12,2053.05 ?.2@4030.4,2001.77
PC11: ?.3@3930.4,2101.77 U1.79 | length 246.7
  Top Layer w10: U1.79 3838.79,2182.83 3919.85,2101.77 ?.3@3930.4,2101.77
PC12: ?.4@4030.4,2101.77 U1.80 | length 357
  Top Layer w10: U1.80 3869.51,2202.52 3912.78,2159.25 3976.51,2159.25 4030.4,2105.35 ?.4@4030.4,2101.77
PC13: U1.7
PC14: U1.8
PC15: U1.9
PD0: ?.5@3930.4,2201.77 U1.81 | length 221.6
  Top Layer w10: U1.81 3885.72,2222.2 3896.76,2211.16 3921.01,2211.16 ?.5@3930.4,2201.77
PD1: ?.6@4030.4,2201.77 U1.82 | length 344.2
  Top Layer w10: U1.82 3871.91,2241.89 3881.77,2251.75 3991.16,2251.75 4030.4,2212.51 ?.6@4030.4,2201.77
PD2: ?.7@3930.4,2301.77 U1.83 | length 229.8
  Top Layer w10: U1.83 3843.35,2261.57 3878.6,2296.82 3925.44,2296.82 ?.7@3930.4,2301.77
PD3: ?.8@4030.4,2301.77 U1.84 | length 363.1
  Top Layer w10: U1.84 3836.3,2281.26 3906.86,2351.82 3980.35,2351.82 ?.8@4030.4,2301.77
PD4: ?.9 U1.85 | length 254.9
  Top Layer w10: U1.85 3817.3,2300.94 3918.14,2401.77 ?.9
PD5: U1.86
PD6: U1.87
PD7: U1.88
PD8: U1.55
PD9: U1.56
PD10: U1.57
PD11: U1.58
PD12: U1.59
PD13: U1.60
PD14: U1.61
PD15: U1.62
PE0: ?.3@3858.17,2973.86 U1.97 | length 533.4
  Top Layer w10: U1.97 3782.7,2537.17 3831.38,2585.85 3831.38,2937.69 3858.17,2964.48 ?.3@3858.17,2973.86
PE1: ?.2@3758.17,2973.86 U1.98 | length 514.7
  Top Layer w10: U1.98 3776.92,2556.85 3813.38,2593.31 3813.38,2905.38 3758.17,2960.59 ?.2@3758.17,2973.86
PE2: U1.1
PE3: U1.2
PE4: U1.3
PE5: U1.4
PE6: U1.5
PE7: U1.38
PE8: U1.39
PE9: U1.40
PE10: U1.41
PE11: U1.42
PE12: U1.43
PE13: U1.44
PE14: U1.45
PE15: U1.46
RESET: C8.1 R3.1 SW2.1 SW2.2 U1.14 | length 1490.1
  Top Layer w10: U1.14 3400.31,2706.96 3416.93,2723.58 v3(3418.28,2723.58)
  Top Layer w20: v3(4134.92,2717.31) 4135.52,2716.71 4370.75,2716.71 ; SW2.1@4536.55,2644.61 4388.52,2644.61 4378.61,2654.51 4377.94,2654.51 4370.75,2661.7 R3.1 4370.75,2716.71 ; SW2.2@4536.55,2792.25 4535.52,2793.28 4388.57,2793.28 4370.75,2775.46 C8.1 4370.75,2716.71
  Bottom Layer w10: v3(3418.28,2723.58) 4127.3,2723.58 4133.57,2717.31 v3(4134.92,2717.31)
pads on no net: 1.3 1.4 1.7 SW_power.1 SW_power.4 SW_power.5 SW_power.6 SW_power.7 U1.73
copper on no net:
  other v4: 4517.24,1734.8 4517.24,2931.14

## Polygon pours and split planes (outlines as drawn)
GND on Bottom Layer "GND_L02_P000" (solid, pour order 0): 2434.87,1659.29 2435.57,1658.59 3502.43,1658.59 3502.43,1505.61 3515.05,1492.99 3876.55,1492.99 3885.91,1502.35 3885.91,1654.62 4589.62,1654.62 4594.89,1659.89 4594.89,3009.55 3353.77,3009.55 3349.75,3013.57 3342.7,3006.53 2437.23,3006.53 2437.23,1657.86 2435.22,1655.86
GND on Top Layer "GND_L01_P005" (solid, pour order 5): 2434.87,1659.29 2435.57,1658.59 3502.43,1658.59 3502.43,1505.61 3515.05,1492.99 3876.55,1492.99 3885.91,1502.35 3885.91,1654.62 4589.62,1654.62 4594.89,1659.89 4594.89,3009.55 3353.77,3009.55 3349.75,3013.57 3342.7,3006.53 2437.23,3006.53 2437.23,1657.86 2435.22,1655.86

## Silkscreen, mask and mechanical layers (free items; w line width, h text height)
Top Overlay:
  drawing of 14 lines, arcs and shapes, not listed
  text "2023-2-19" at 3841.66,2542.32 h100
  text "李祥瑞" at 3953.53,2440.68 h100
  text "+" at 2527.22,1787.9 h100
  text "-" at 2535.75,1700.83 h100
Bottom Overlay:
  drawing of 14 lines, arcs and shapes, not listed
Mechanical 1:
  lines w25: 2410.94,1636.4 2410.94,3029.59 ; 2412.31,1636.45 3313.27,1636.45 3481.61,1636.45 3481.61,1484.95 3507.97,1458.59 3880.26,1458.59 3909.22,1487.55 3909.22,1636.45 4080.49,1636.45 4608.86,1636.45 ; 2414.27,3030.55 2512.86,3030.55 3009.87,3030.55 3009.87,3424.26 3362.01,3424.26 3362.01,3030.55 4061.68,3030.55 4610.82,3030.55 ; 4611.61,1636.38 4611.61,3029.56